# Altium PCB lora1121m.PcbDoc
Units mm, origin at the board's own origin, x right, y up, seen from the top; angles counter-clockwise.
Board outline 50 x 57 mm, 2 copper layers (Top Layer, Bottom Layer); 17 components, 19 nets, 73 pads, 62 vias.
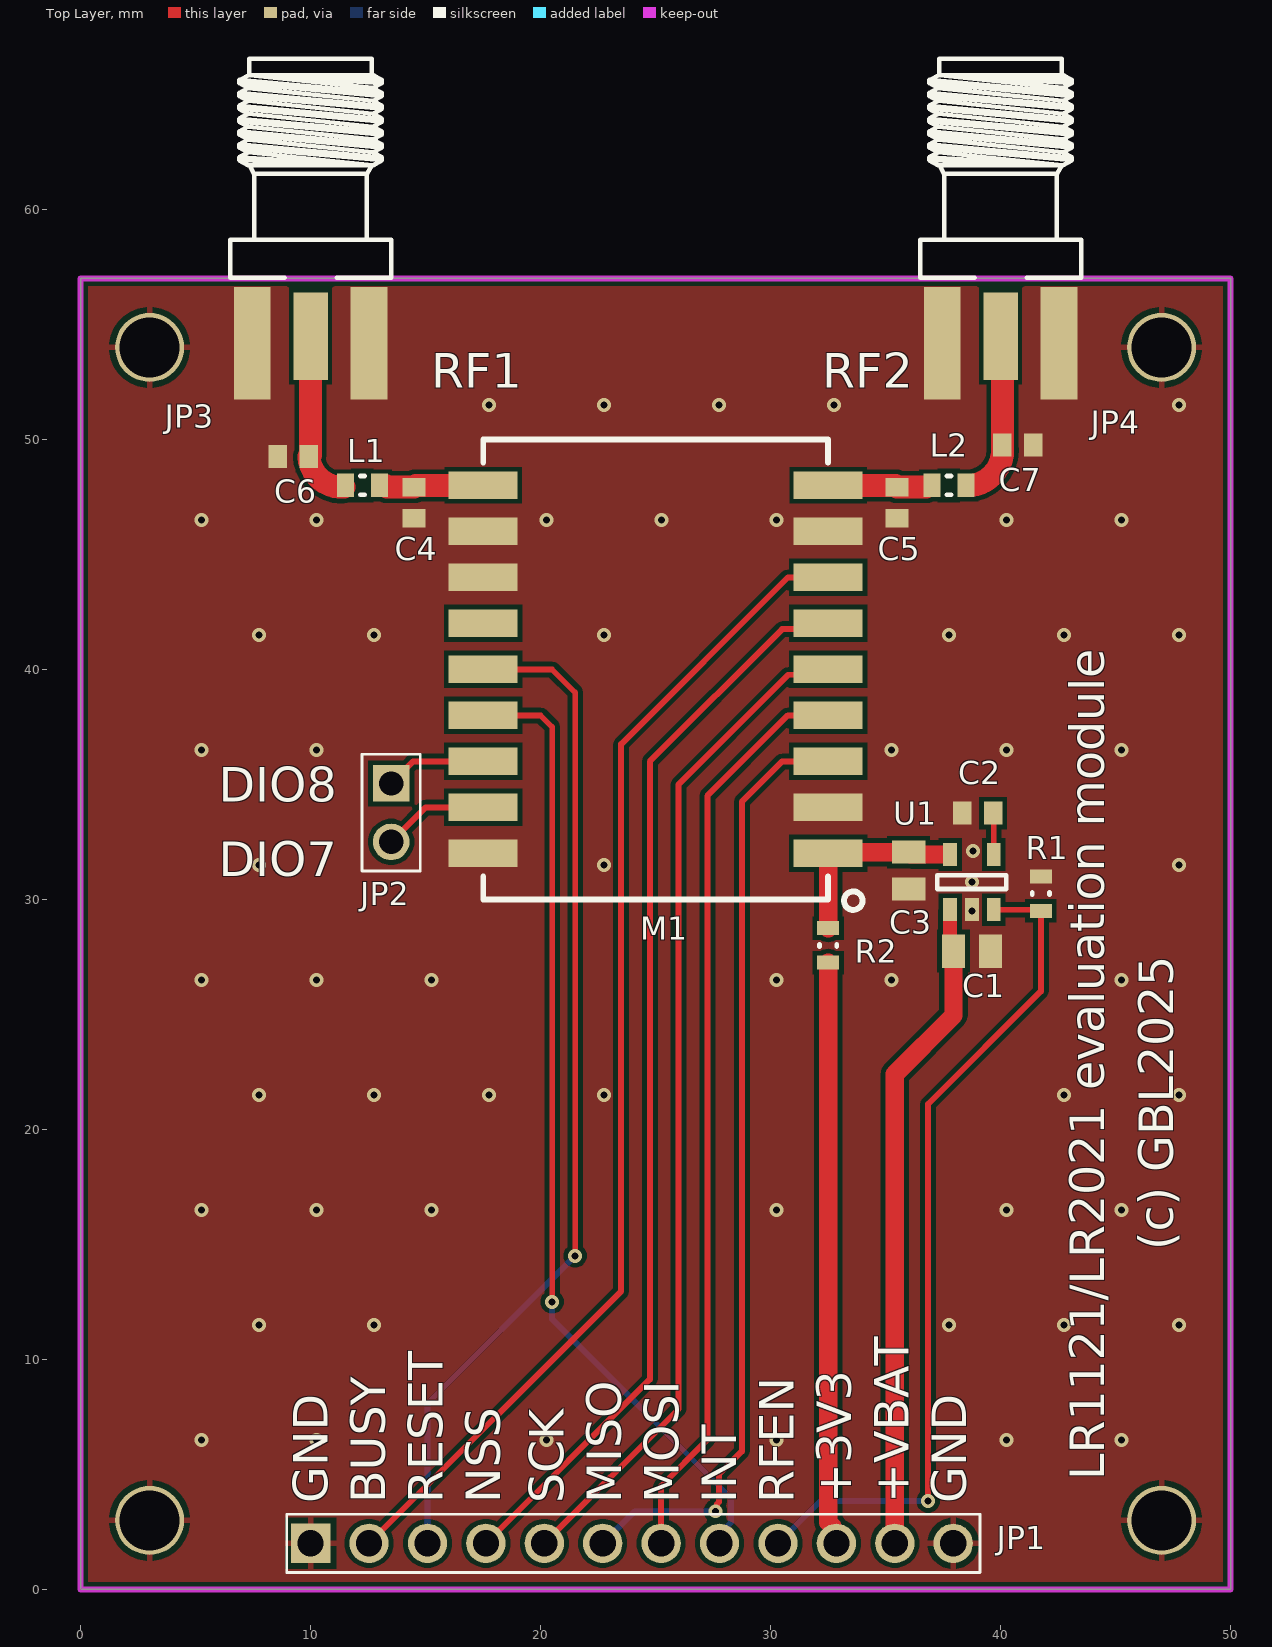
[diagram p0: Top Layer view]
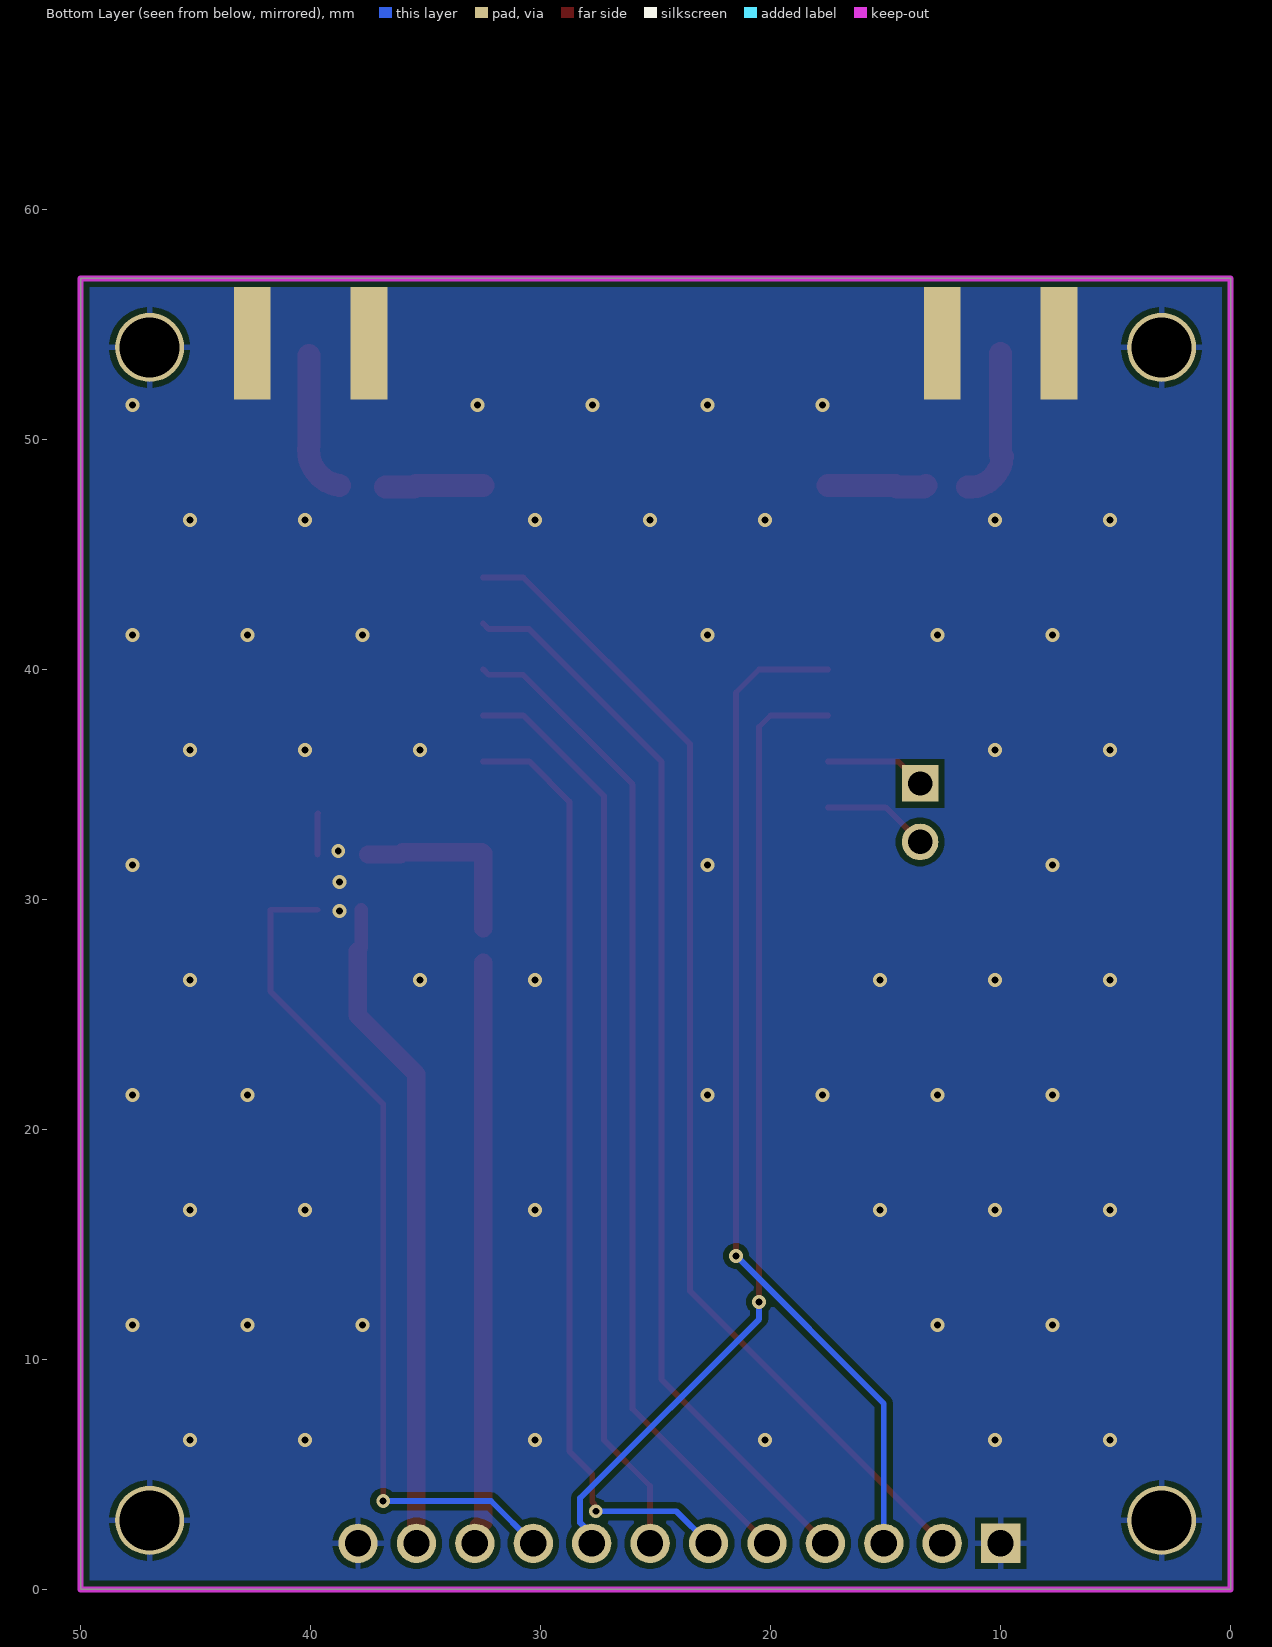
[diagram p1: Bottom Layer view, seen from below]
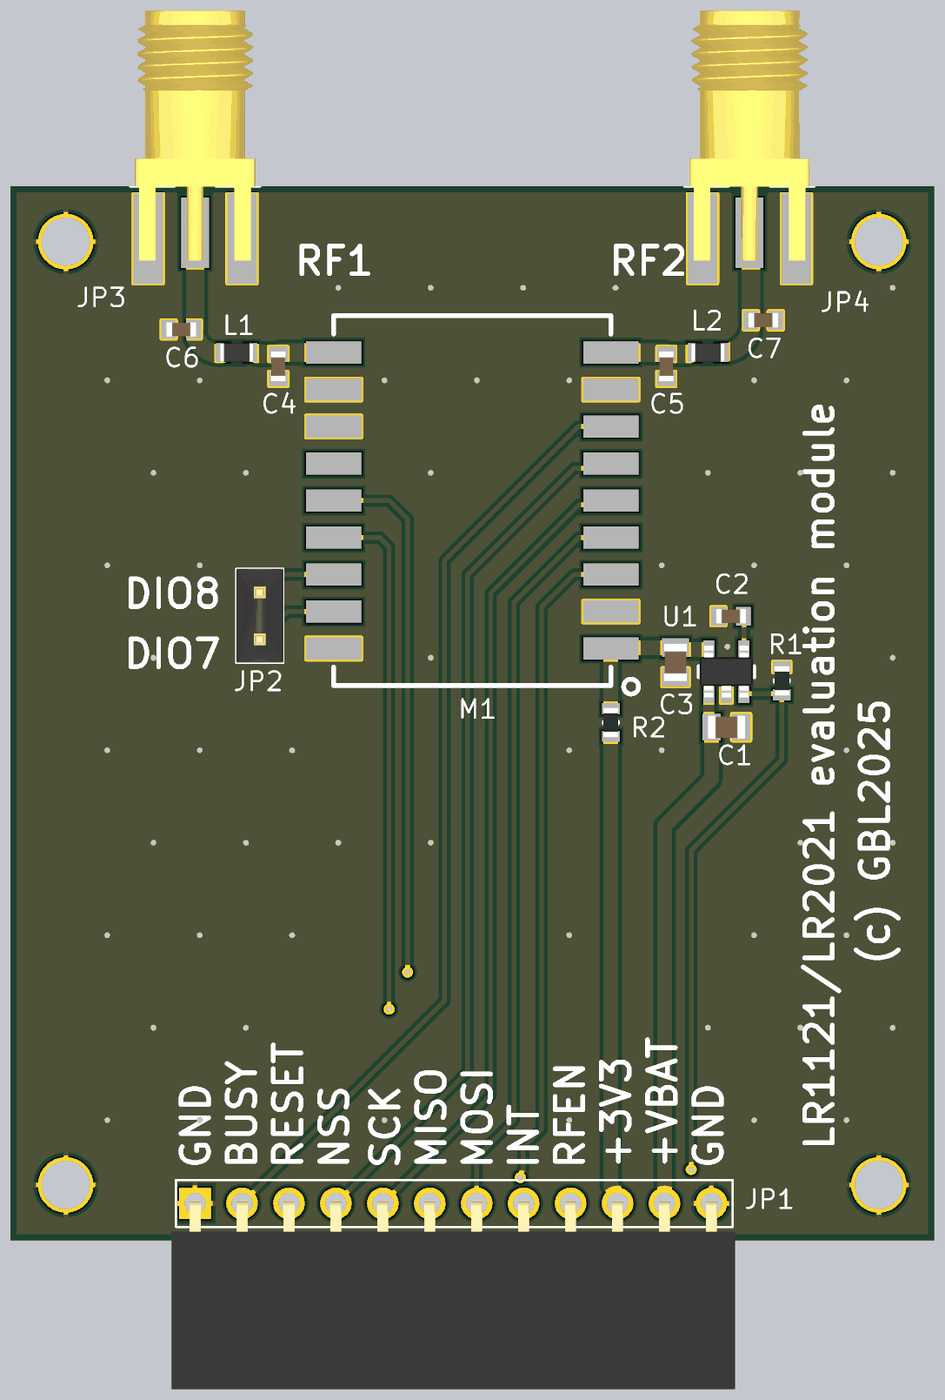
[diagram p2: 3D render of the assembled board from above, using the file's embedded part models]

## Layer stack, top to bottom
Top Solder: solder mask 0.0102, Solder Resist, Dk 3.5
Top Layer: signal copper 0.0356
Dielectric 1: dielectric 0.32, FR-4, Dk 4.8
Bottom Layer: signal copper 0.0356
Bottom Solder: solder mask 0.0102, Solder Resist, Dk 3.5

## Board outline
0,0 50,0 50,57 0,57

## Design rules (kind name [scope] priority, off if disabled: settings)
Clearance [All] p1: gap=0.2 ignorepadtopadclearanceinfootprint=FALSE
HoleSize [All] p1: absolutevalues=TRUE maxlimit=5 minlimit=0.025 maxpercent=80.000 minpercent=20.000
MinimumSolderMaskSliver [All] p1: minsoldermaskwidth=0.01
PolygonConnect PolygonConnect_1 [All vs IsNamedPolygon('GND_L01_P000') Or IsNamedPolygon('GND_L02_P001')] p1: thpad.connectstyle=Relief thpad.reliefconductorwidth=0.254 thpad.reliefentries=4 thpad.polygonreliefangle="90 Angle" thpad.airgapwidth=0.254 smdpad.connectstyle=Direct smdpad.reliefconductorwidth=0.254 smdpad.reliefentries=4 smdpad.polygonreliefangle="90 Angle" smdpad.airgapwidth=0.254 via.connectstyle=Direct via.reliefconductorwidth=0.254 via.reliefentries=4 via.polygonreliefangle="90 Angle" via.airgapwidth=0.254
PolygonConnect [All] p2: connectstyle=Relief reliefconductorwidth=0.254 reliefentries=4 polygonreliefangle="90 Angle" airgapwidth=0.254
RoutingVias [All] p1: holewidth=0.711 width=1.27 viastyle="Through Hole" minholewidth=0.711 minwidth=1.27 maxholewidth=0.711 maxwidth=1.27
SilkToSilkClearance [All] p1: silktosilkclearance=0.1
SilkToSolderMaskClearance [IsPad] p1: minsilkscreentomaskgap=0.1 clearancetoexposedcopper=TRUE
SolderMaskExpansion [All] p1: expansion=0.102 istentingtop=FALSE
Width [All] p1: maxlimit=2 minlimit=0.2 preferedwidth=0.25
26 further rules are at their usual default settings.

## Components (designator, comment, footprint, x,y, rotation, side; value= is the part's Value field where it differs from the comment)
C1 "CAPN" C-0805 38.75,27.75 r0 top
C2 "CAPN" C-0603 39,33.75 r180 top
C3 "CAPN" C-0805 36,31.25 r270 top
C4 "CAPN" C-0603 14.5,47.25 r270 top
C5 "CAPN" C-0603 35.5,47.25 r270 top
C6 "CAPN" C-0603 9.25,49.25 r180 top
C7 "CAPN" C-0603 40.75,49.75 r0 top
JP1 "CON12" PBS1-12R 10,2 r0 top locked
JP2 "HEADER 2" PLS1-2 13.5,35.04 r270 top
JP3 "EM-SA071-GGT" SMA_F_EDGE 10,55.75 r270 top
JP4 "EM-SA071-GGT" SMA_F_EDGE 40,55.75 r270 top
L1 "L" L-0603 12.25,48 r180 top
L2 "L" L-0603 37.75,48 r0 top
M1 "LORA1121" LORA1121 25,40 r180 top
R1 "RES" R-0603 41.75,30.25 r270 top
R2 "RES" R-0603 32.5,28 r270 top
U1 "LP5907MFX-3.0" SOT-23-5 38.75,30.75 r90 top

## Footprints (in the part's own frame and the unit in brackets; to place one, negate y for a bottom-side part, rotate by r counter-clockwise, add the part's x,y. Pads: shape width x height; smd on the part's side, far side on the other; paste and mask are expansions set on the pad)
C-0603 [mm] "Chip Capacitor, 2-Leads, Body 1,60x0,80mm, IPC Medium Density"
  rect 0.8x1 smd: 1(-0.675,0) 2(0.675,0)
  body extent -0.8,-0.4 0.8,0.4, height 0.8
C-0805 [mm] "Chip Capacitor, 2-Leads, Body 2,00x1,25mm, IPC Medium Density"
  rect 1x1.45 smd: 1(-0.8,0) 2(0.8,0)
  body extent -1,-0.62 1,0.63, height 1.25
L-0603 [mm] "Chip Inductor, 2-Leads, Body 1,60x0,80mm, IPC Medium Density"
  rect 0.74x1.02 smd: 1(-0.735,0) 2(0.735,0)
  silkscreen extent -0.1,-0.41 0.1,0.41, body extent -0.9,-0.5 0.9,0.5, height 1
LORA1121 [mm]
  rect 3x1.2 smd: 1(-7.5,8) 2(-7.5,6) 3(-7.5,4) 4(-7.5,2) 5(-7.5,0) 6(-7.5,-2) 7(-7.5,-4) 8(-7.5,-6) 9(-7.5,-8) 10(7.5,-8) 11(7.5,-6) 12(7.5,-4) 13(7.5,-2) 14(7.5,0) 15(7.5,2) 16(7.5,4) 17(7.5,6) 18(7.5,8)
  silkscreen extent -8.99,-10 7.5,10.46, body extent -7.5,-10 7.5,10, height 2
PBS1-12R [mm] "Header, Vertical, 2.54 mm pitch; 0.70 mm lead width, 10 pins, 1 row, 10 pins per row, 24.13 mm L X 2.54 mm W X 7.54 mm H body"
  rect 1.71x1.71 hole 1.14 paste-1.71: 1(0,0)
  round 1.71 hole 1.14 paste-1.71: 2(2.54,0) 3(5.08,0) 4(7.62,0) 5(10.16,0) 6(12.7,0) 7(15.24,0) 8(17.78,0) 9(20.32,0) 10(22.86,0) 11(25.4,0) 12(27.94,0)
  silkscreen extent -1.04,-1.27 29.1,1.27, body extent -1.27,-10.03 29.21,0.1, height 2.54
PLS1-2 [mm] "Header, Vertical, 2.54 mm pitch; 0.64 mm lead width, 2 pins, 1 row, 2 pins per row, 5.08 mm L X 2.54 mm W X 8.54 mm H body"
  rect 1.59x1.59 hole 1.06 paste-1.59: 1(0,0)
  round 1.59 hole 1.06 paste-1.59: 2(2.54,0)
  silkscreen extent -1.27,-1.27 3.81,1.27, body extent -1.27,-1.27 3.81,1.27, height 8.54
R-0603 [mm] "Chip Resistor, 2-Leads, Body 1,60x0,82mm, IPC Medium Density"
  rect 0.6x0.95 smd: 1(-0.75,0) 2(0.75,0)
  silkscreen extent -0.05,-0.38 0.05,0.38, body extent -0.8,-0.4 0.8,0.4, height 0.45
SMA_F_EDGE [mm] "SMA End Launch Jack for 1.58mm PCB, 50 Ohm, Flat Tab Contact"
  rect 3.81x1.5 smd: 1(1.27,0)
  rect 4.9x1.6 smd: 2(1.575,2.54) 2(1.575,-2.54)
  rect 4.9x1.6 smd far side: 2(1.575,2.54) 2(1.575,-2.54)
  silkscreen extent -10.81,-3.5 -1.28,3.5, body extent -10.73,-3.25 2.77,3.25, height 3.7
SOT-23-5 [mm] "SOT23, 5-Leads, Body 2,90x2,45mm, Pitch 0,95mm, IPC Medium Density"
  rect 1x0.6 smd: 1(-1.2,0.95) 2(-1.2,0) 3(-1.2,-0.95) 4(1.2,-0.95) 5(1.2,0.95)
  silkscreen extent -0.3,-1.5 0.3,1.5, body extent -1.4,-1.45 1.4,1.45, height 1.55

## Part data
C1 C2 C3 C4 C5 C6 C7: Voltage=50V, Вид=Конденсатор, Точність/група=NP0
JP1: "Connector", Вид=Роз'єм
JP3 JP4: library part SMA, "SMA Female R/A PCB Mount", Вид=Роз'єм
U1: library part LP5907, "250mA Low-Dropout Regulator", Вид=Мікросхема
JP2: Вид=Роз'єм
L1 L2: Вид=Індуктивність
R1 R2: Вид=Резистор, Точність/група=5%

## Free pads (board coordinates)
  round 3 hole 2.6: 1(3,3) 1(3,54) 1(47,3) 1(47,54)

## Via types
v1: diameter 0.6, hole 0.3, Top Layer to Bottom Layer, tented both sides, 58 vias
v2: diameter 0.6, hole 0.3, Top Layer to Bottom Layer, 4 vias

## Nets (pads, with @x,y where several pads share a name; then routed paths per layer and width w, separated by ;. In a path a pad name is that pad's centre, name@x,y a point inside that pad or via, vN(x,y) a via of type N, cw(c..) or ccw(c..) an arc to the next point about the centre after c; other vN are vias at no path point)
GND: C1.2 C2.2 C3.2 C4.2 C5.2 C6.2 C7.2 JP1.1 JP1.12 JP3.2 JP4.2 M1.2 M1.8 M1.11 M1.12 M1.18 pad.1 R1.1 U1.2
  other v1: 5.25,6.5 10.25,6.5 20.25,6.5 30.25,6.5 40.25,6.5 45.25,6.5 7.75,11.5 12.75,11.5 37.75,11.5 42.75,11.5 47.75,11.5 5.25,16.5 10.25,16.5 15.25,16.5 30.25,16.5 40.25,16.5 45.25,16.5 7.75,21.5 12.75,21.5 17.75,21.5 22.75,21.5 42.75,21.5 47.75,21.5 5.25,26.5 10.25,26.5 15.25,26.5 30.25,26.5 35.25,26.5 45.25,26.5 38.75,29.5 38.75,30.75 7.75,31.5 22.75,31.5 47.75,31.5 38.8,32.099 5.25,36.5 10.25,36.5 35.25,36.5 40.25,36.5 45.25,36.5 7.75,41.5 12.75,41.5 22.75,41.5 37.75,41.5 42.75,41.5 47.75,41.5 5.25,46.5 10.25,46.5 20.25,46.5 25.25,46.5 30.25,46.5 40.25,46.5 45.25,46.5 17.75,51.5 22.75,51.5 27.75,51.5 32.75,51.5 47.75,51.5
MISO: JP1.6 M1.3 | length 41.3
  Top Layer w0.254: v2(27.601,3.398) 27.667,3.464 27.667,3.708 27.758,3.8 27.758,5.008 28.75,6 28.75,34.25 30.5,36 M1.3
  Bottom Layer w0.254: JP1.6 24.098,3.398 v2(27.601,3.398)
MOSI: JP1.7 M1.4 | length 40
  Top Layer w0.254: JP1.7 25.24,4.49 27.25,6.5 27.25,34.5 30.75,38 M1.4
NetC2_1: C2.1 U1.4 | length 1.8
  Top Layer w0.25: C2.1 39.7,33.725 U1.4
NetC3_1: C3.1 M1.1 R2.1 U1.5 | length 8.3
  Top Layer w0.254: M1.1 M1.1@32.55,32.05 ; C3.1 C3.1@36.1,31.95
  Top Layer w0.8: R2.1 M1.1 ; M1.1@32.55,32.05 C3.1 ; C3.1@36.1,31.95 U1.5@37.5,31.95
NetC4_1: C4.1 L1.1 M1.10 | length 4.6
  Top Layer w0.254: L1.1 L1.1@13.25,48 ; C4.1 C4.1@14.575,48
  Top Layer w1: L1.1@13.25,48 13.325,47.925 C4.1 ; C4.1@14.575,48 M1.10
NetC5_1: C5.1 L2.1 M1.9 | length 4.3
  Top Layer w0.254: C5.1@35.425,48 C5.1
  Top Layer w1: M1.9 C5.1@35.425,48 ; C5.1 L2.1@36.75,47.925
NetC6_1: C6.1 JP3.1 L1.2 | length 6.9
  Top Layer w0.25: C6.1 C6.1@10,49.325
  Top Layer w0.254: L1.2@11.44,47.925 L1.2
  Top Layer w1: C6.1 ccw(c11.345,49.345) L1.2@11.44,47.925 ; C6.1@10,49.325 JP3.1@10,53.73
NetC7_1: C7.1 JP4.1 L2.2 | length 6.4
  Top Layer w0.25: JP4.1@40,53.73 JP4.1@40.075,53.655
  Top Layer w1: L2.2@38.75,48 ccw(c38.538,49.538) C7.1 JP4.1@40.075,53.655
NetJP2_1: JP2.1 M1.16 | length 4.4
  Top Layer w0.254: JP2.1 14.46,36 M1.16
NetJP2_2: JP2.2 M1.17 | length 4.6
  Top Layer w0.254: JP2.2 15,34 M1.17
RF_BUSY: JP1.2 M1.7 | length 51.3
  Top Layer w0.254: JP1.2 23.5,12.96 23.5,36.75 30.75,44 M1.7
RF_CS: JP1.4 M1.6 | length 47.2
  Top Layer w0.254: JP1.4 24.75,9.13 24.75,36 30.5,41.75 32.25,41.75 M1.6
RF_EN: JP1.9 R1.2 U1.3 | length 37
  Top Layer w0.254: v2(36.846,3.838) 36.846,21.096 41.75,26 R1.2 ; U1.3 R1.2@41.75,29.55
  Bottom Layer w0.254: JP1.9 32.158,3.838 v2(36.846,3.838)
RF_INT: JP1.8 M1.15 | length 42.1
  Top Layer w0.25: M1.15 20,38 20.5,37.5 v2(20.5,12.5)
  Bottom Layer w0.254: v2(20.5,12.5) 20.5,11.75 28.282,3.968 28.282,2.896 27.78,2.394 JP1.8
RF_RST: JP1.3 M1.14 | length 44.1
  Top Layer w0.25: M1.14 20.5,40 21.5,39 v2(21.5,14.5)
  Bottom Layer w0.254: JP1.3 15.08,8.08 v2(21.5,14.5)
SCK: JP1.5 M1.5 | length 44
  Top Layer w0.254: JP1.5 26,7.84 26,35 30.768,39.768 32.268,39.768 M1.5
V_BATT: C1.1 JP1.11 U1.1 | length 28.7
  Top Layer w0.254: C1.1@37.8,27.9 C1.1
  Top Layer w0.6: C1.1@37.8,27.9 U1.1
  Top Layer w0.8: JP1.11 35.4,22.4 37.95,24.95 C1.1
VCC: JP1.10 R2.2 | length 25.4
  Top Layer w0.8: R2.2 32.5,2.924 32.686,2.738 32.686,2.174 JP1.10
pads on no net: M1.13

## Polygon pours and split planes (outlines as drawn)
GND on Top Layer "GND_L01_P000" (solid, remove dead copper, pour order 0): 0,0 50,0 50,57 0,57
GND on Bottom Layer "GND_L02_P001" (solid, remove dead copper, pour order 1): 0,0 50,0 50,57 0,57

## Keep-outs
Keep-Out Layer:
  the board outline again, w0.254

## Other copper
Top Layer:
  pour cut-out: 37.25,48.75 37.25,47.25 38.25,47.25 38.25,48.75
  pour cut-out: 11.75,48.75 11.747,48.747 11.747,47.236 12.736,47.236 12.75,47.25 12.75,48.75

## Silkscreen, mask and mechanical layers (free items; w line width, h text height)
Top Overlay:
  text "RF1" at 15.254,52.254 h1.5
  text "RF2" at 32.254,52.254 h1.5
  text "DIO8" at 6.004,34.254 h1.5
  text "DIO7" at 6.004,31.004 h1.5
  text "(c) GBL2025" at 47.496,14.754 h1.5 r90
  text "LR1121/LR2021 evaluation module" at 44.496,4.754 h1.5 r90
  text "GND" at 10.746,3.754 h1.5 r90
  text "BUSY" at 13.246,3.754 h1.5 r90
  text "RESET" at 15.746,3.754 h1.5 r90
  text "NSS" at 18.246,3.754 h1.5 r90
  text "SCK" at 20.996,3.754 h1.5 r90
  text "MISO" at 23.496,3.754 h1.5 r90
  text "MOSI" at 25.996,3.754 h1.5 r90
  text "INT" at 28.496,3.754 h1.5 r90
  text "RFEN" at 30.996,3.754 h1.5 r90
  text "+3V3" at 33.496,3.754 h1.5 r90
  text "+VBAT" at 35.996,3.754 h1.5 r90
  text "GND" at 38.496,3.754 h1.5 r90